# Altium PCB OGS_Headstage.PcbDoc
Units mil, origin at the board's own origin, x right, y up, seen from the top; angles counter-clockwise.
Board outline 6000 x 4000 mil, 2 copper layers (Top Layer, Bottom Layer); 50 components, 41 nets, 198 pads, 16 vias.
Unrouted connection lines stored in the file: 2.
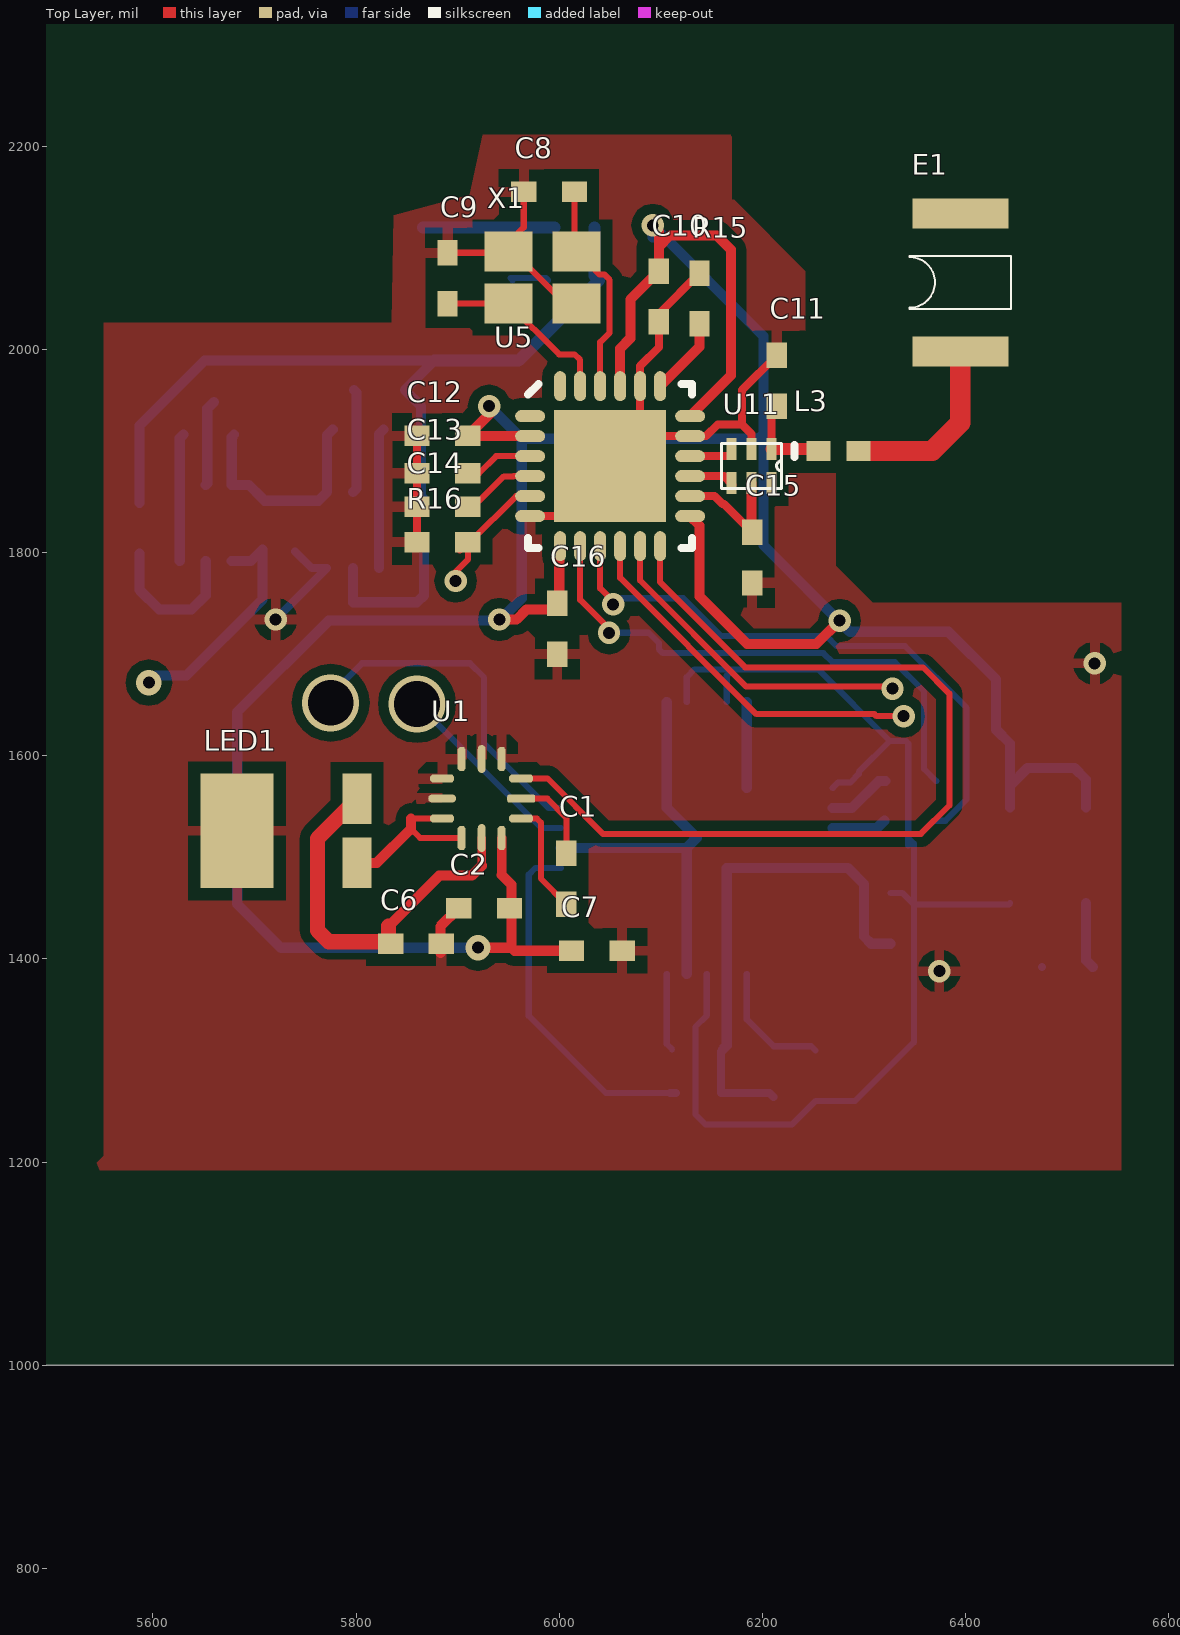
[diagram p0: Top Layer view]
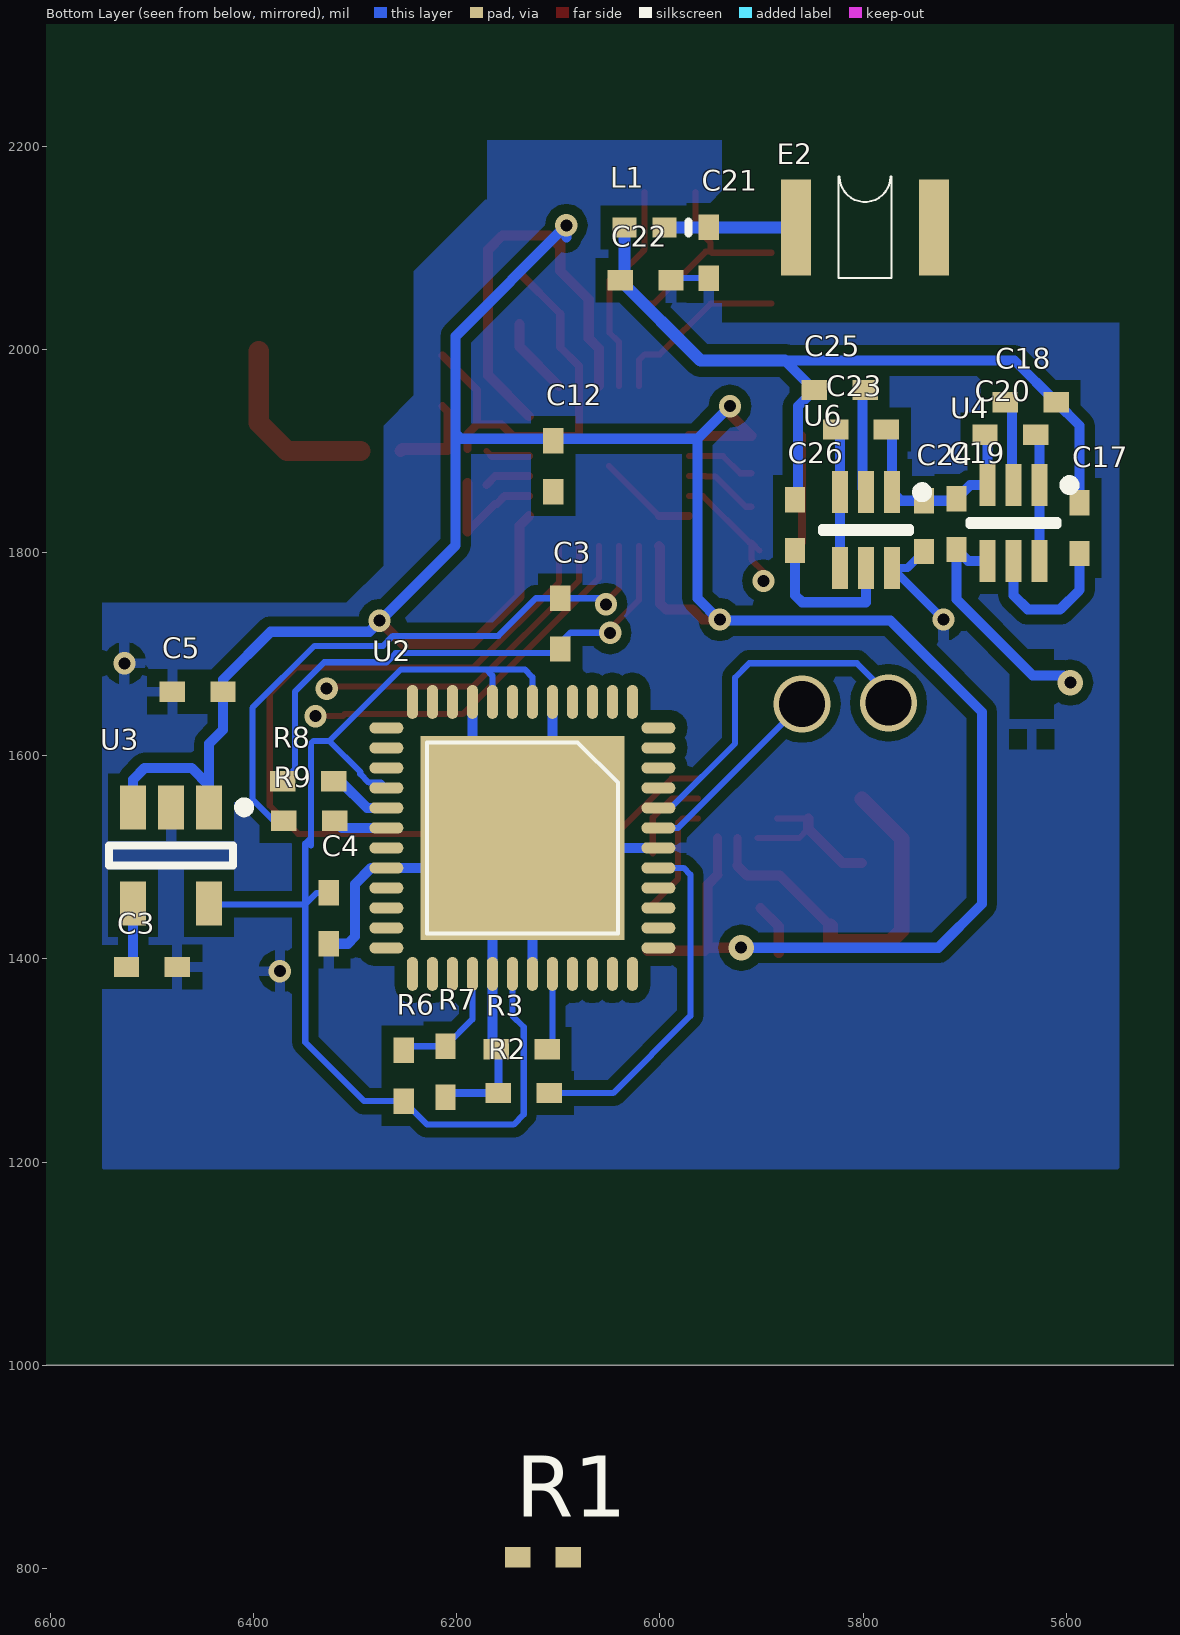
[diagram p1: Bottom Layer view, seen from below]

## Layer stack, top to bottom
Top Layer: signal copper 1.4
Dielectric: dielectric 12.6, FR-4, Dk 4.8
Bottom Layer: signal copper 1.4

## Board outline
1000,1000 7000,1000 7000,5000 1000,5000

## Design rules (kind name [scope] priority, off if disabled: settings)
Clearance Plane_pad_clear [IsPad vs InPolygon] p1: gap=12
Clearance "plane clear" [InPolygon vs InNetClass('All Nets')] p2: gap=10
Clearance clearance1 [All] p3: gap=6
ComponentClearance [All] p1: gap=6 collisioncheckmode=3 verticalgap=0 showdistances=TRUE
Height [All] p1 off: minheight=0 maxheight=1000 prefheight=500
HoleSize [All] p1: absolutevalues=TRUE maxlimit=100 minlimit=10 maxpercent=80.000 minpercent=20.000
HoleToHoleClearance [All] p1: gap=6 allowstackedmicrovias=TRUE
MinimumSolderMaskSliver [All] p1: minsoldermaskwidth=6
PlaneClearance [All] p1: clearance=15
PlaneConnect [All] p1: planeconnectstyle=Direct reliefexpansion=20 reliefentries=4 reliefconductorwidth=10 reliefairgap=10
PolygonConnect [All] p1: connectstyle=Relief reliefconductorwidth=10 reliefentries=4 polygonreliefangle="90 Angle"
RoomDefinition RF_POWER [InComponentClass('RF_POWER')] p1: confinementstyle=ConfineIn formatcopy=TRUE lockcomponents=FALSE outline 7045,1056 10120,1056 10120,1521 7045,1521
RoomDefinition SingleASIC [InComponentClass('SingleASIC')] p2 off: confinementstyle=ConfineIn formatcopy=TRUE lockcomponents=FALSE outline 7045,1245 8520,1245 8520,1460 7045,1460
RoomDefinition Main_4x4 [InComponentClass('Main_4x4')] p3 off: confinementstyle=ConfineIn formatcopy=TRUE lockcomponents=FALSE outline 0,0 2000,0 2000,1000 0,1000
RoomDefinition LED_SOP [InComponentClass('LED_SOP')] p4 off: confinementstyle=ConfineIn formatcopy=TRUE lockcomponents=FALSE outline 7045,1060 7330,1060 7330,1195 7045,1195
RoutingCorners [All] p1: cornerstyle=45-Degree minsetback=20 maxsetback=20
RoutingVias [All] p1: holewidth=12 width=22 viastyle="Through Hole" minholewidth=12 minwidth=22 maxholewidth=30 maxwidth=50
SilkscreenOverComponentPads [OnLayer('Mechanical 13') vs OnLayer('Mechanical 15')] p1: minsilkscreentomaskgap=10
SolderMaskExpansion [All] p1: expansion=0
Width Width_v3p0 [InNet('V3P0')] p1: maxlimit=50 minlimit=6 preferedwidth=10
Width [All] p2: maxlimit=30 minlimit=6 preferedwidth=6
19 further rules are at their usual default settings.

## Classes and differential pairs
component class LED_SOP: C1 C2 C6 C7 LED1 U1
component class Main_4x4: C8 C9 C10 C11 C12 C13 C14 C15 C16 E1 L3 R15 R16 U5 U11 X1
component class SingleASIC: C3 C4 C5 R1 R2 R3 R6 R7 R8 R9 U2 U3
component class RF_POWER: C17 C18 C19 C20 C21 C22 C23 C24 C25 C26 E2 L1 U4 U6

## Components (designator, comment, footprint, x,y, rotation, side; value= is the part's Value field where it differs from the comment)
C1 "NP0 50V" 0402S 6007,1479 r90 top
C2 "NP0 50V" 0402S 5926,1450 r0 top
C3 "NP0 50V" 0402S 6098,1730 r270 bottom
C3 "NP0 50V" 0402s 6500,1392 r0 bottom
C4 "NP0 50V" 0402s 6326,1440 r270 bottom
C5 "NP0 50V" 0402s 6455,1663 r180 bottom
C6 "NP0 50V" 0402s 5859,1415 r0 top
C7 "NP0 50V" 0402s 6037,1408 r180 top
C8 "NP0 50V" 0402S 5990,2155 r0 top
C9 "NP0 50V" 0402S 5890,2070 r90 top
C10 "NP0 50V" 0402S 6098,2052 r270 top
C11 "NP0 50V" 0402S 6214,1969 r270 top
C12 "NP0 50V" 0402S 5885,1915 r180 top
C12 "NP0 50V" 0402s 6105,1885 r270 bottom
C13 "NP0 50V" 0402S 5885,1878 r0 top
C14 "NP0 50V" 0402S 5885,1845 r180 top
C15 "NP0 50V" 0402S 6190,1795 r270 top
C16 "NP0 50V" 0402S 5998,1725 r90 top
C17 "NP0 50V" 0402s 5587,1824 r90 bottom
C18 "NP0 50V" 0402s 5635,1948 r0 bottom
C19 "NP0 50V" 0402s 5708,1828 r90 bottom
C20 "NP0 50V" 0402s 5655,1916 r180 bottom
C21 "NP0 50V" 0402s 5952,2095 r90 bottom
C22 "NP0 50V" 0402s 6014,2068 r0 bottom
C23 "NP0 50V" 0402s 5802,1921 r0 bottom
C24 "NP0 50V" 0402s 5740,1826 r90 bottom
C25 "NP0 50V" 0402s 5823,1960 r0 bottom
C26 "NP0 50V" 0402s 5867,1827 r90 bottom
E1 "MicroAntenna" MICROANTENNA 6394.73,1998 r90 top
E2 "MicroAntenna" microantenna 5866,2120 r180 bottom
L1 "Inductor" 0402-A 6015,2120 r0 bottom
L3 "Inductor" 0402-A 6275,1900 r0 top
LED1 "osram_hiled" "LUXEON LED" 5801,1526 r180 top
R1 "Res2" 0402s 6115,811 r180 bottom
R2 "Res2" 0402S 6134,1268 r0 bottom
R3 "Res2" 0402S 6136,1311 r0 bottom
R6 "Res2" 0402S 6252,1285 r270 bottom
R7 "Res2" 0402S 6211,1289 r90 bottom
R8 "Res2" 0402S 6346,1575 r180 bottom
R9 "Res2" 0402S 6345,1536 r180 bottom
R15 "Res2" 0402S 6138,2050 r90 top
R16 "Res2" 0402S 5885,1810 r0 top
U1 "ZLED7022" 12UTQFN 5904,1519 r90 top
U2 "Single_ASIC_QFN48" Quad48 6027,1653 r270 bottom
U3 "tps79915" SOT23-5AN 6481,1502 r270 bottom
U4 "HSMS-286R" SOT363-6M 5652,1829 r270 bottom
U5 "QFN24 4x4 package" NORDIC_QFN50P400X400X90-25N 6050,1885 r0 top
U6 "HSMS-286R" SOT363-6M 5797,1822 r270 bottom
U11 "balun" BALUN 6209,1902 r270 top
X1 "TSX-3225, 16MHz, Cl=9pF, +/-10ppm" "BT-XTAL 2.5 X 2 MM" 5950,2045 r0 top

## Footprints (in the part's own frame and the unit in brackets; to place one, negate y for a bottom-side part, rotate by r counter-clockwise, add the part's x,y. Pads: shape width x height; smd on the part's side, far side on the other; paste and mask are expansions set on the pad)
12UTQFN [mm]
  oct 0.6x0.2 smd: 1(0,0) 3(0,-1) 7(1.975,-1) 9(1.975,0)
  oval 0.7x0.2 smd: 2(0,-0.5) 8(1.975,-0.5)
  oct 0.2x0.6 smd: 4(0.487,-1.487) 6(1.487,-1.487) 10(1.487,0.487) 12(0.487,0.487)
  rrect50% 0.2x0.7 smd: 5(0.987,-1.487)
  oval 0.2x0.7 smd: 11(0.987,0.487)
0402-A [mm] "Chip Inductor, Body 1.0x0.5mm, IPC High Density"
  rect 0.6x0.5 smd: 1(-0.5,0) 2(0.5,0)
  silkscreen extent -1.1,-0.15 -1.1,0.15, body extent -0.55,-0.3 0.55,0.3, height 0.55
0402S [mil]
  rect 25x20 smd: 1(-25,0) 2(25,0)
0402s [mil]
  rect 25x20 smd: 1(-25,0) 2(25,0)
BALUN [mm]
  rect 0.55x0.25 smd: 1(0,0) 2(0,-0.5) 3(0,-1) 4(0.85,-1) 5(0.85,-0.5) 6(0.85,0)
  silkscreen extent -0.14,-1.25 0.99,0.25
"BT-XTAL 2.5 X 2 MM" [mm] "Mercury X32 series"
  rect 1.2x1 smd: 1(0,0) 2(1.7,0) 3(1.7,1.3) 4(0,1.3)
"LUXEON LED" [mm] "Luxeon LED"
  rect 0.73x1.26 smd: 1(0,0.8) 2(0,-0.8)
  rect 1.83x2.86 smd: TP(3,0)
MICROANTENNA [mm]
  rect 0.75x2.4 smd: 1(0,0) 2(3.45,0)
  silkscreen extent 1.06,-1.27 2.39,1.27
microantenna [mm]
  rect 0.75x2.4 smd: 1(0,0) 2(3.45,0)
  silkscreen extent 1.06,-1.27 2.39,1.27
NORDIC_QFN50P400X400X90-25N [mm] "QFN24 4x4x0.85mm, 0.5mm pitch - Medium Density"
  oval 0.75x0.3 smd: 1(-2,1.25) 2(-2,0.75) 3(-2,0.25) 4(-2,-0.25) 5(-2,-0.75) 6(-2,-1.25) 13(2,-1.25) 14(2,-0.75) 15(2,-0.25) 16(2,0.25) 17(2,0.75) 18(2,1.25)
  oval 0.3x0.75 smd: 7(-1.25,-2) 8(-0.75,-2) 9(-0.25,-2) 10(0.25,-2) 11(0.75,-2) 12(1.25,-2) 19(1.25,2) 20(0.75,2) 21(0.25,2) 22(-0.25,2) 23(-0.75,2) 24(-1.25,2)
  rect 2.8x2.8 smd: 25(0,0)
  silkscreen extent -2.05,-2.05 2.05,2.05
Quad48 [mm]
  oval 0.85x0.28 smd: 1(0,0) 2(0,-0.5) 3(0,-1) 4(0,-1.5) 5(0,-2) 6(0,-2.5) 7(0,-3) 8(0,-3.5) 9(0,-4) 10(0,-4.5) 11(0,-5) 12(0,-5.5) 25(6.8,-5.5) 26(6.8,-5) 27(6.8,-4.5) 28(6.8,-4) 29(6.8,-3.5) 30(6.8,-3) 31(6.8,-2.5) 32(6.8,-2) 33(6.8,-1.5) 34(6.8,-1) 35(6.8,-0.5) 36(6.8,0)
  oval 0.28x0.85 smd: 13(0.65,-6.15) 14(1.15,-6.15) 15(1.65,-6.15) 16(2.15,-6.15) 17(2.65,-6.15) 18(3.15,-6.15) 19(3.65,-6.15) 20(4.15,-6.15) 21(4.65,-6.15) 22(5.15,-6.15) 23(5.65,-6.15) 24(6.15,-6.15) 37(6.15,0.65) 38(5.65,0.65) 39(5.15,0.65) 40(4.65,0.65) 41(4.15,0.65) 42(3.65,0.65) 43(3.15,0.65) 44(2.65,0.65) 45(2.15,0.65) 46(1.65,0.65) 47(1.15,0.65) 48(0.65,0.65)
  rect 5.1x5.1 smd: 49(3.4,-2.75)
  silkscreen extent 1.01,-5.14 5.79,-0.36
SOT23-5AN [mm] "SOT23, 5-Leads, Body 2.9x1.6mm, Pitch 0.95mm, Lead Span 2.8mm, IPC Medium Density"
  rect 1.1x0.65 smd: 1(-1.2,0.95) 2(-1.2,0) 3(-1.2,-0.95) 4(1.2,-0.95) 5(1.2,0.95)
  silkscreen extent -1.32,-1.55 0.25,1.95, body extent -0.9,-1.55 0.9,1.55, height 1.45
SOT363-6M [mm]
  rect 1.05x0.4 smd: 1(-0.95,0.65) 2(-0.95,0) 3(-0.95,-0.65) 4(0.95,-0.65) 5(0.95,0) 6(0.95,0.65)
  silkscreen extent -1.07,-1.1 0.05,1.52, body extent -0.7,-1.1 0.7,1.1

## Part data
C1 C2 C3 C3 C4 C5 C6 C7 C8 C9 C10 C11 C12 C12 C13 C14 C15 C16 C17 C18 C19 C20 C21 C22 C23 C24 C25 C26: library part Cap, "Capacitor"
R1 R2 R3 R6 R7 R8 R9 R15 R16: "Resistor"
U1: "ZLED 7022"
U5: library part "nRF24LE1 - 4x4", "2.4GHz Tranceiver with embedded MCU and 10 bit ADC"
X1: library part BT-XTAL, "Crystal"

## Via types
v1: diameter 22, hole 11.8, Top Layer to Bottom Layer, 12 vias
v2: diameter 25, hole 11.8, Top Layer to Bottom Layer, 2 vias
v3: diameter 56, hole 45, Top Layer to Bottom Layer, 2 vias

## Nets (pads, with @x,y where several pads share a name; then routed paths per layer and width w, separated by ;. In a path a pad name is that pad's centre, name@x,y a point inside that pad or via, vN(x,y) a via of type N, cw(c..) or ccw(c..) an arc to the next point about the centre after c; other vN are vias at no path point)
ADC+: C3.1@6098,1755 R9.1 U5.9 | length 591.7
  Top Layer w6: U5.9 6040.16,1764.84 6056,1749 v1(6053,1749)
  Bottom Layer w6: v1(6053,1749) 6059,1755 6098,1755 6122,1755 6159,1718 6262.72,1718 6272.72,1708 6340,1708 6401,1647 6401,1557 6380,1536 R9.1
ADC-: C3.2@6098,1705 R8.1 U5.8 | length 533.4
  Top Layer w6: U5.8 6020.47,1753.53 6053,1721 v1(6049,1721)
  Bottom Layer w6: v1(6049,1721) 6088,1721 6098,1711 6098,1705 6102,1701 6260,1701 6269,1692 6330.28,1692 6359,1663.28 6359,1587 R8.1
ELEC: U2.43 | length 191.9
  Bottom Layer w6: v3(5860,1651) 5982.02,1528.98 U2.43
ELEC_REF: R1.2 U2.44 | length 347.1
  Bottom Layer w6: v3(5775,1652) 5773,1652 5773,1658 5806,1691 5912,1691 5926,1677 5926,1612.02 5989.35,1548.67 U2.44
FCSN: U5.11 | length 325.5
  Top Layer w6: U5.11 6079.53,1772.47 6184,1668 v1@6328,1668
  other v1: 6328,1666
FMISO: U5.10 | length 366.7
  Top Layer w6: U5.10 6059.84,1775.16 6194.06,1640.94 6288,1640.94 6310.11,1640.94 6312.05,1639 v1(6339,1639)
GND: C2.1 C3.1@6475,1392 C4.2 C5.1 C6.2 C7.1 C8.1 C9.2 C10.2 C11.1 C12.2@5860,1915 C13.1 C14.2 C15.2 C16.1 C21.1 C22.1 C24.1 LED1.TP R1.1 R2.2 R3.2 R7.1 R15.2 R16.1 U1.7 U1.8 U1.9 U1.10 U1.11 U2.5 U2.9 U2.20 U2.29 U2.31 U2.42 U2.49 U3.2 U5.6 U5.17 U5.20 U5.25 U6.6 U11.2 X1.2 X1.4 | length 2010.2
  Top Layer w6: C9.2 5948.82,2095 X1.4 ; C8.1 5965,2120 5950,2105 X1.4 ; U5.25@6000.79,1835.79 U5.25 ; X1.2 6006.03,2045 5954.85,2096.18 X1.4
  Top Layer w8: R16.1 C14.2 C13.1 C12.2@5860,1915 ; U5.6 U5.25@6000.79,1835.79 ; R15.2 6098,2035 C10.2 6098,2002 6079.53,1983.53 U5.20 6079.53,1914.53 U5.17 6144.53,1914.53 6156,1926 6180,1926 ; U11.2 6189.31,1916.68 6180,1926 ; C11.1 6180,1960 6180,1926
  Top Layer w10: C6.2@5883,1406 5883,1432 C2.1
  Bottom Layer w6: C21.1@5954,2068 C21.1 5987,2070 C22.1
  Bottom Layer w8: v1@5720,1734 v1(5720.81,1734) U6.6 5756.4,1784.6 C24.1 ; R3.2@6159,1309 R2.2 6207,1268 R7.1
  Bottom Layer w10: U2.42 6125.43,1509.3 U2.49 6105.74,1548.67 U2.5 ; U2.31 U2.49@6125.43,1509.3 ; R3.2 6164.8,1314.8 U2.29 6164.8,1489.61 U2.20 6284.01,1489.61 6300,1473.63 6300,1422 6307,1415 C4.2 ; U2.49@6184.48,1568.35 U2.9
  other v1: 6374,1388 6527,1691
LED_CTRL: U1.6 U5.12 | length 931.4
  Top Layer w6: U1.6 5988.44,1577.56 6043,1523 6356,1523 6384,1551 6384,1661 6358,1687 6183,1687 6099.21,1770.79 U5.12
NetC1_1: C1.1 U1.4 | length 111.5
  Top Layer w6: U1.4 5977.81,1538.19 5982,1534 5982,1479 C1.1
NetC1_2: C1.2 U1.5 | length 87.3
  Top Layer w6: U1.5 5988.12,1557.88 6007,1539 C1.2
NetC3_2: C3.2@6525,1392 U3.4 | length 65.5
  Bottom Layer w10: U3.4 6518.4,1398.6 C3.2@6525,1392
NetC8_2: C8.2 U5.22 X1.3 | length 212.3
  Top Layer w6: C8.2 6015,2098.11 X1.3 6039.43,2073.68 6044.28,2073.68 6049.55,2068.41 6049.55,2016.32 6040.16,2006.92 U5.22
NetC9_1: C9.1 U5.23 X1.1 | length 179.2
  Top Layer w6: C9.1 X1.1 6000,1995 6015,1995 6020.47,1989.53 U5.23
NetC11_2: C11.2 L3.1 U11.1 | length 91.2
  Top Layer w8: U11.1 6209,1939 C11.2
  Top Layer w12: U11.1 6253.32,1902 L3.1
NetC13_2: C13.2 U5.3 | length 68.2
  Top Layer w6: C13.2 5921,1878 5937.84,1894.84 U5.3
NetC14_1: C14.1 U5.4 | length 73.8
  Top Layer w6: C14.1 5915.5,1845 5945.5,1875 5955,1875 5955.16,1875.16 U5.4
NetC15_1: C15.1 U5.14 U11.5 | length 122.8
  Top Layer w8: U5.14 6152.8,1855.47 6160.57,1847.71 6162.29,1847.71 C15.1@6189.31,1820.68
  Top Layer w10: C15.1@6189.31,1820.68 U11.5
NetC17_1: C17.1 U4.5 | length 148.3
  Bottom Layer w10: C17.1 5587,1763 5606,1744 5638,1744 5652,1758 U4.5
NetC17_2: C17.2 C18.1 C22.2 C25.2 C26.2 L1.2 | length 797.9
  Bottom Layer w10: C17.2 5587,1925 C18.1 5651,1989 5877,1989 C25.2 5864,1944 5864,1855 C26.2 ; C22.2@6034.69,2072.31 C22.2
  Bottom Layer w12: 5877,1989 5960,1989 C22.2 ; C22.2@6034.69,2072.31 L1.2
NetC18_2: C18.2 U4.2 | length 84.9
  Bottom Layer w10: U4.2 5653.5,1867.9 5653.5,1941.5 C18.2
NetC19_2: C19.2 C20.1 C23.1 C24.2 U4.3 U6.1 | length 215.4
  Bottom Layer w10: C20.1 5677.59,1913.59 U4.3 5694.6,1866.4 C19.2 ; C19.2@5710,1851 C24.2 5763.01,1851 U6.1 5771.41,1915.41 C23.1
NetC20_2: C20.2 U4.1 U4.6 | length 125.9
  Bottom Layer w10: U4.6 U4.1 5626.41,1912.41 C20.2
NetC21_2: C21.2 E2.1 L1.1 | length 129.3
  Bottom Layer w12: E2.1 C21.2 L1.1
NetC23_2: C23.2 U6.3 U6.4 | length 138.2
  Bottom Layer w10: U6.4 U6.3 5822.59,1916.59 C23.2
NetC25_1: C25.1 U6.2 | length 103.1
  Bottom Layer w10: U6.2 5800.5,1862.9 5800.5,1957.5 C25.1
NetC26_1: C26.1 U6.5 | length 150.5
  Bottom Layer w10: U6.5 5797,1751 5860,1751 5867,1758 C26.1
NetE1_1: E1.1 L3.2 | length 181.8
  Top Layer w20: L3.2 6367,1900 6394.73,1927.72 E1.1
NetLED1_1: LED1.1 U1.1 U1.12 | length 161.6
  Top Layer w6: 5854,1528 5863,1519 U1.1 ; 5854,1538.19 U1.12
  Top Layer w10: LED1.1 5820.5,1494.5 5854,1528 5854,1538.19
NetR2_1: R2.1 U2.41 | length 349.6
  Bottom Layer w6: U2.41 5976.61,1489.61 5970,1483 5970,1344 6046,1268 R2.1
  Bottom Layer w8: R2.1 R2.1@6115,1268
NetR3_1: R3.1 U2.32 | length 76.5
  Bottom Layer w6: U2.32 6105.74,1316.26 R3.1
NetR6_1: R6.1 R7.2 U2.28 | length 124.9
  Bottom Layer w6: U2.28 6184.48,1340.52 R7.2 6248,1314 R6.1
NetR8_2: R8.2 U2.17 | length 62.8
  Bottom Layer w10: U2.17 6288.17,1548.67 6314.5,1575 R8.2
NetR9_2: R9.2 U2.18 | length 53.8
  Bottom Layer w10: U2.18 6312.98,1528.98 R9.2
NetR15_1: R15.1 U5.19 | length 77.3
  Top Layer w10: U5.19 6138,2002.53 R15.1
NetR16_2: R16.2 U5.5 | length 136.9
  Top Layer w6: v1@5892,1772 5898,1778 5898,1781 5910,1793 R16.2 ; R16.2@5902,1802 R16.2 ; U5.5 5957.55,1855.47 5912.08,1810 R16.2
  other v1: 5898,1772
NetU5_15: U5.15 U11.4 | length 45.5
  Top Layer w8: U5.15 6162.01,1875.16 U11.4@6170.63,1866.54
NetU5_16: U5.16 U11.3 | length 44
  Top Layer w6: U11.3@6165.47,1894.84 U11.3@6170.63,1900
  Top Layer w8: U5.16 U11.3@6165.47,1894.84
V1P5: C4.1 R6.2 U2.6 U2.8 U2.16 U2.30 U3.5 | length 1208.9
  Bottom Layer w6: U2.6 6125.43,1677.42 6133,1685 6171,1685 ; U2.30 6145.11,1344.11 6134,1333 6134,1247 6144,1237 6229,1237 R6.2 6291,1260 6349,1318 6349,1453.76 ; U2.8 6164.8,1678.8 6171,1685 ; U2.16 6274.3,1573.53 6286.36,1573.53 6294.86,1582.03 6294.86,1584.09 6325.27,1614.5 ; C4.1 6337.76,1465 6349,1453.76 ; 6343.5,1511.5 6343.5,1519 ; U3.5 6442.6,1453.76 6349,1453.76 ; 6171,1685 6254.77,1685 6325.27,1614.5 ; 6325.27,1614.5 6341,1614.5 6343.5,1612 6343.5,1519 ; 6343.5,1519 6349,1513.5 6349,1453.76
V3P0: C2.2 C5.2 C7.2 C10.1 C12.1 C16.2 U1.3 U3.1 U3.3 U5.2 U5.7 U5.13 U5.18 U5.21 | length 3228.4
  Top Layer w9: 5943.37,1482.63 U1.3
  Top Layer w10: v2(5920,1411) 5953,1411 ; v1(5931,1944) 5931,1936 5910,1915 5910.47,1914.53 U5.2 ; v1(5941,1734) 5958,1734 5968,1744 5994,1744 6000,1750 6000,1805.47 U5.7 ; 5943.37,1482.63 5953,1473 5953,1411 ; C7.2 5956,1408 5953,1411 ; U5.21 6059.84,2000.7 6070,2010.86 6070,2049 C10.1 6098,2101 ; v1(6092,2122) 6098,2116 6098,2101 ; U5.13 6138,1826.53 6138,1757 6185,1710 6253,1710 v1(6276,1733) ; U5.18 6169,1974.47 6169,2098 6155,2112 6109,2112 6098,2101
  Bottom Layer w10: v2(5920,1411) 5726,1411 5683,1454 5683,1643 5773,1733 5941,1733 5963,1755 5963,1912 ; v1(5931,1944) 5963,1912 ; 6092,2110 v1(6092,2122) 6201,2013 6201,1917 ; U3.1 U3.1@6443.6,1570.6 ; U3.3 6518.4,1576.6 6507,1588 6461,1588 U3.1@6443.6,1570.6 ; 5963,1912 6196,1912 6201,1917 ; 6201,1917 6201,1807 6286,1722 6383,1722 6430,1675 C5.2 6430,1625.6 6443.6,1612 U3.1@6443.6,1570.6
VOUT: C6.1 LED1.2 U1.2 | length 379.1
  Top Layer w8: 5923.69,1491.68 U1.2
  Top Layer w10: 5832,1432.29 5881.71,1482 5914,1482 5923.69,1491.68
  Top Layer w15: LED1.2 5762,1518.5 5762,1428 5773,1417 5832,1417 5832,1432.29
VRF: C19.1 U4.4 | length 230.1
  Bottom Layer w10: v2(5596,1672) 5603,1679 5633,1679 5708,1754 C19.1 5696.6,1791.6 U4.4
pads on no net: C12.2@6105,1860 E1.2 E2.2 U2.1 U2.2 U2.3 U2.4 U2.7 U2.10 U2.11 U2.12 U2.13 U2.14 U2.15 U2.19 U2.21 U2.22 U2.23 U2.24 U2.25 U2.26 U2.27 U2.33 U2.34 U2.35 U2.36 U2.37 U2.38 U2.39 U2.40 U2.45 U2.46 U2.47 U2.48 U5.1 U5.24 U11.6
copper on no net: | length 7.7
  Bottom Layer w6: 5846,1658 5850,1662 5850,1664

## Polygon pours and split planes (outlines as drawn)
GND on Bottom Layer "Top Layer-No Net" (solid, pour order 14): 5548,2212 5548,1194.44 5549.31,1193.22 6547.69,1193.22 6549,1192 6549,2205.9 5553.23,2205.9 5549.31,2209.56
GND on Top Layer "Top Layer-No Net" (solid, pour order 12): 5551.83,2211 5551.83,1206.06 5537,1192 6553.17,1192 6553.17,2196.94 6568,2211 5551.83,2211

## Other copper
Top Layer:
  pour cut-out: 6169,2210 6170,2209 6170,2147 6172,2147 6242,2077 6242,1955 6272,1925 6272,1787 6308.67,1750.33 6562,1750.33 6562,2222 6452.48,2211 6444,2211 6443,2212 6442,2211 6170,2211
  pour cut-out: 5537,2026 5537,2278 5939,2278 5912,2152 5837,2132 5835,2026
Bottom Layer:
  pour cut-out: 6169,2210 6170,2209 6170,2147 6172,2147 6242,2077 6242,1955 6272,1925 6272,1787 6308.67,1750.33 6556,1750.33 6556,2225 6444,2211 6443,2212 6442,2211 6170,2211
  pour cut-out: 5537,2026 5537,2278 5939,2278 5939,2026